# Altium PCB FPV0-3.PcbDoc (part 6 of 6)
Units mm, origin at the board's own origin, x right, y up, seen from the top; angles counter-clockwise.
Board outline 81.28 x 53.34 mm, 4 copper layers (Top Layer, GND Plane 1, 3v3 Plane 2, Bottom Layer); 178 components, 250 nets, 836 pads, 217 vias.
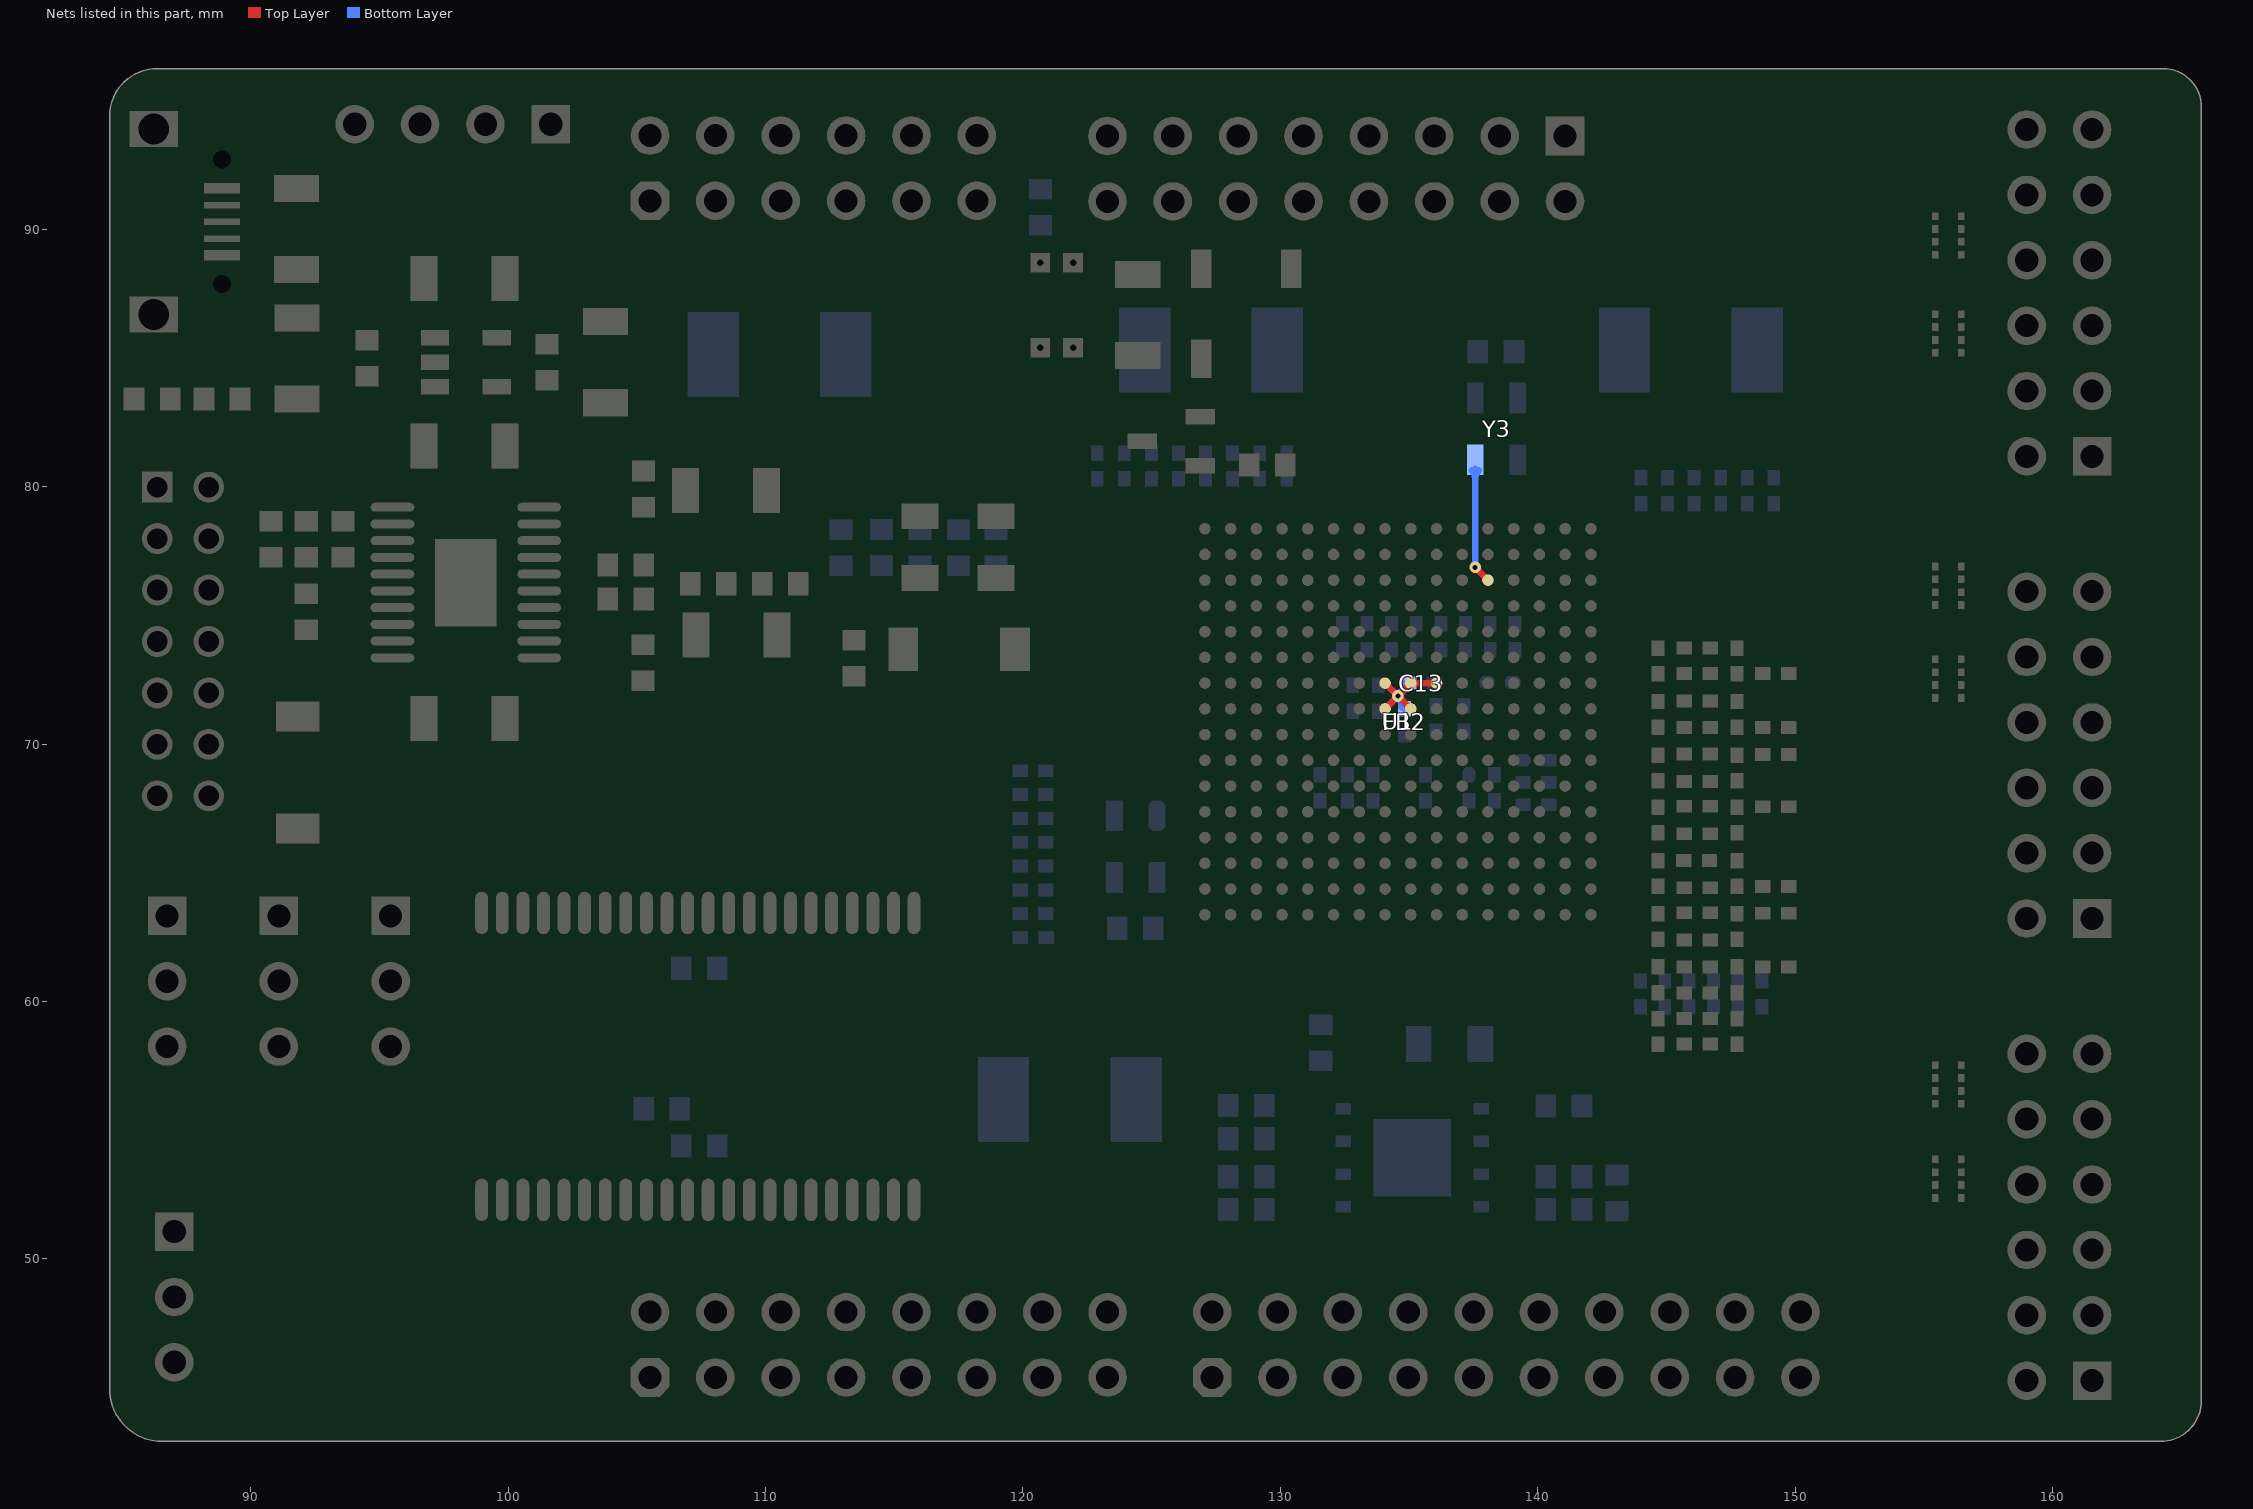
[diagram p8: the nets of this part, all layers, seen from the top]

## Via types
v1: diameter 0.45, hole 0.2, Top Layer to Bottom Layer, tented both sides, 150 vias
v2: diameter 0.55, hole 0.3, Top Layer to Bottom Layer, tented both sides, 55 vias
v3: diameter 0.45, hole 0.2, Top Layer to Bottom Layer, 6 vias
v4: diameter 0.666, hole 0.4, Top Layer to Bottom Layer, tented both sides, 4 vias
v5: diameter 0.513, hole 0.3, Top Layer to Bottom Layer, tented both sides, 1 vias
v6: diameter 0.55, hole 0.23, Top Layer to Bottom Layer, tented both sides, 1 vias

## Nets (pads, with @x,y where several pads share a name; then routed paths per layer and width w, separated by ;. In a path a pad name is that pad's centre, name@x,y a point inside that pad or via, vN(x,y) a via of type N, cw(c..) or ccw(c..) an arc to the next point about the centre after c; other vN are vias at no path point) (continued)
XADCGND: C13.2 FB2.2 U1.G7 U1.H7 U1.H8 U1.J7 U1.J8 | length 10.8
  Top Layer w0.254: U1.J8@134.069,71.366 v1(134.569,71.866) ; U1.J8@134.069,71.464 ccw(c134.069,71.701) 134.236,71.533 ccw(c134.404,71.366) U1.J8@134.167,71.366 ; U1.J7@134.069,72.268 cw(c134.069,72.031) 134.236,72.199 cw(c134.404,72.366) U1.J7@134.167,72.366 ; U1.J7@134.069,72.366 v1(134.569,71.866) ; U1.H8@134.971,71.366 ccw(c134.735,71.366) 134.902,71.533 ccw(c135.069,71.701) U1.H8@135.069,71.464 ; U1.H7@134.971,72.366 cw(c134.735,72.366) 134.902,72.199 cw(c135.069,72.031) U1.H7@135.069,72.268 ; U1.H8@135.069,71.366 v1(134.569,71.866) ; U1.H7@135.138,72.297 cw(c135.306,72.129) 135.306,72.366 cw(c135.306,72.603) U1.H7@135.138,72.435 ; U1.G7@136,72.297 ccw(c135.833,72.129) 135.833,72.366 ccw(c135.833,72.603) U1.G7@136,72.435 ; U1.G7@136.069,72.366 U1.H7@135.069,72.366 v1(134.569,71.866) ; 134.402,71.699 cw(c134.569,71.531) 134.569,71.768 cw(c134.569,71.531) 134.736,71.699 cw(c134.904,71.866) 134.667,71.866 cw(c134.904,71.866) 134.736,72.033 cw(c134.569,72.201) 134.569,71.964 cw(c134.569,72.201) 134.402,72.033 cw(c134.235,71.866) 134.471,71.866 cw(c134.235,71.866) 134.402,71.699
  Bottom Layer w0.254: v1@134.544,71.961 ccw(c134.463,72.261) 134.733,72.106 ; v1@134.569,71.768 cw(c134.569,71.531) 134.736,71.699 cw(c134.904,71.866) 134.667,71.866 cw(c134.904,71.866) 134.736,72.033 cw(c134.569,72.201) v1@134.569,71.964 ; v1@134.629,71.926 ccw(c134.19,72.365) C13.2@134.811,72.365 ; FB2.2@134.702,71.438 ccw(c134.229,71.526) v1(134.569,71.866) ; FB2.2@134.823,71.366 134.823,71.612 v1(134.569,71.866) ; C13.2@135.068,72.365 v1(134.569,71.866)
XCLK: U1.E3 Y3.3 | length 6.4
  Top Layer w0.254: v1@137.569,76.768 cw(c137.569,76.531) 137.736,76.699 cw(c137.904,76.866) v1@137.667,76.866 ; v1(137.569,76.866) U1.E3@138.069,76.366 ; 137.902,76.533 cw(c137.735,76.366) U1.E3@137.971,76.366 ; 137.902,76.533 ccw(c138.069,76.701) U1.E3@138.069,76.464
  Bottom Layer w0.254: Y3.3@137.439,80.631 cw(c137.125,80.317) 137.569,80.317 ; v1@137.5,76.935 ccw(c137.332,77.103) 137.569,77.103 ccw(c137.806,77.103) v1@137.638,76.935 ; v1(137.569,76.866) Y3.3@137.569,80.693 ; 137.569,80.268 cw(c138.082,80.268) Y3.3@137.719,80.631
pads on no net: JTAG1.12 LS1.0 P2.2 P2.4 P2.6 P2.8 P3.1 U3.1 U3.2 U3.21 U3.22 U3.23 U3.24 U3.25 U3.42 U3.43 U3.44 U4.1 U4.11 U4.20 USB1.0 USB1.2 USB1.3 USB1.4 USB1.6 USB1.7 Y1.1 Y3.1
copper on no net: | length 55.5
  Top Layer w0.127: 92.532,46.66 94.48,46.66 ; 92.532,46.787 94.099,46.787 ; 92.532,46.914 93.718,46.914 ; 92.659,45.263 94.734,45.263 ; 92.786,46.533 92.956,46.533 ; 92.913,45.39 93.464,45.39 ; 93.04,45.136 94.607,45.136 ; 93.167,45.517 93.464,45.517 ; 93.167,45.644 93.464,45.644 ; 93.167,45.771 93.464,45.771 ; 93.167,45.898 93.464,45.898 ; 93.167,46.025 93.464,46.025 ; 93.167,46.152 93.464,46.152 ; 93.167,46.533 94.607,46.533 ; 93.294,44.882 94.099,44.882 ; 93.294,45.009 94.353,45.009 ; 93.294,46.279 93.591,46.279 ; 93.294,46.406 93.591,46.406 ; 93.421,44.755 93.972,44.755 ; 93.929,45.39 94.861,45.39 ; 94.183,45.517 94.861,45.517 ; 94.31,45.644 94.988,45.644 ; 94.31,46.406 94.734,46.406 ; 94.437,45.771 94.988,45.771 ; 94.564,45.898 94.988,45.898 ; 94.564,46.025 94.988,46.025 ; 94.691,46.152 94.988,46.152 ; 94.691,46.279 94.861,46.279 ; 95.199,46.66 97.147,46.66 ; 95.199,46.787 96.766,46.787 ; 95.199,46.914 96.385,46.914 ; 95.326,45.263 97.401,45.263 ; 95.453,46.533 95.623,46.533 ; 95.58,45.39 96.131,45.39 ; 95.707,45.136 97.274,45.136 ; 95.834,45.517 96.131,45.517 ; 95.834,45.644 96.131,45.644 ; 95.834,45.771 96.131,45.771 ; 95.834,45.898 96.131,45.898 ; 95.834,46.025 96.131,46.025 ; 95.834,46.152 96.131,46.152 ; 95.834,46.533 97.274,46.533 ; 95.961,44.882 96.766,44.882 ; 95.961,45.009 97.02,45.009 ; 95.961,46.279 96.258,46.279 ; 95.961,46.406 96.258,46.406 ; 96.088,44.755 96.639,44.755 ; 96.596,45.39 97.528,45.39 ; 96.85,45.517 97.528,45.517 ; 96.977,45.644 97.655,45.644 ; 96.977,46.406 97.401,46.406 ; 97.104,45.771 97.655,45.771 ; 97.231,45.898 97.655,45.898 ; 97.231,46.025 97.655,46.025 ; 97.358,46.152 97.655,46.152 ; 97.358,46.279 97.528,46.279 ; 98.12,45.136 98.544,45.136 ; 98.12,45.263 98.544,45.263 ; 98.12,45.39 98.544,45.39 ; 98.247,44.882 98.544,44.882 ; 98.247,45.009 98.544,45.009 ; 98.247,45.517 98.544,45.517 ; 98.247,45.644 99.052,45.644 ; 98.247,45.771 99.179,45.771 ; 98.247,45.898 98.671,45.898 ; 98.247,46.025 98.671,46.025 ; 98.247,46.152 98.671,46.152 ; 98.247,46.279 98.671,46.279 ; 98.247,46.406 98.671,46.406 ; 98.247,46.533 98.798,46.533 ; 98.247,46.914 98.671,46.914 ; 98.374,44.755 98.544,44.755 ; 98.374,46.66 98.798,46.66 ; 98.374,46.787 98.671,46.787 ; 98.374,47.041 98.544,47.041 ; 98.755,45.517 99.306,45.517 ; 98.882,45.39 99.433,45.39 ; 99.009,45.263 99.56,45.263 ; 99.009,45.898 99.306,45.898 ; 99.136,45.136 99.814,45.136 ; 99.136,46.025 99.433,46.025 ; 99.136,46.152 99.56,46.152 ; 99.263,46.279 99.941,46.279 ; 99.39,45.009 99.941,45.009 ; 99.39,46.406 99.941,46.406 ; 99.39,46.533 100.068,46.533 ; 99.517,44.882 100.068,44.882 ; 99.517,46.66 100.068,46.66 ; 99.644,46.787 100.068,46.787 ; 99.771,44.755 100.068,44.755 ; 99.771,46.914 99.941,46.914

## Polygon pours and split planes (outlines as drawn)
GND on GND Plane 1 (split plane): 86.346,95.73 164.316,95.73 164.328,95.731 164.441,95.724 164.565,95.699 164.684,95.659 164.797,95.603 164.901,95.533 164.996,95.45 165.079,95.356 165.149,95.251 165.204,95.139 165.245,95.019 165.269,94.896 165.277,94.783 165.275,94.771 165.275,44.481 165.277,44.467 165.268,44.341 165.241,44.203 165.196,44.07 165.134,43.945 165.056,43.828 164.964,43.723 164.858,43.63 164.742,43.552 164.616,43.49 164.483,43.445 164.346,43.418 164.219,43.41 164.206,43.411 86.556,43.411 86.541,43.41 86.383,43.418 86.213,43.447 86.047,43.495 85.887,43.561 85.735,43.645 85.594,43.745 85.466,43.86 85.35,43.989 85.25,44.13 85.167,44.282 85.1,44.441 85.053,44.607 85.024,44.778 85.015,44.935 85.016,44.951 85.016,94.401 85.015,94.414 85.023,94.55 85.048,94.697 85.089,94.84 85.146,94.978 85.218,95.109 85.305,95.231 85.404,95.342 85.516,95.442 85.637,95.528 85.768,95.6 85.906,95.657 86.05,95.699 86.197,95.724 86.333,95.731
3V3 on 3v3 Plane 2 (split plane): 86.346,95.73 164.316,95.73 164.328,95.731 164.441,95.724 164.565,95.699 164.684,95.659 164.797,95.603 164.901,95.533 164.996,95.45 165.079,95.356 165.149,95.251 165.204,95.139 165.245,95.019 165.269,94.896 165.277,94.783 165.275,94.771 165.275,44.481 165.277,44.467 165.268,44.341 165.241,44.203 165.196,44.07 165.134,43.945 165.056,43.828 164.964,43.723 164.858,43.63 164.742,43.552 164.616,43.49 164.483,43.445 164.346,43.418 164.219,43.41 164.206,43.411 86.556,43.411 86.541,43.41 86.383,43.418 86.213,43.447 86.047,43.495 85.887,43.561 85.735,43.645 85.594,43.745 85.466,43.86 85.35,43.989 85.25,44.13 85.167,44.282 85.1,44.441 85.053,44.607 85.024,44.778 85.015,44.935 85.016,44.951 85.016,94.401 85.015,94.414 85.023,94.55 85.048,94.697 85.089,94.84 85.146,94.978 85.218,95.109 85.305,95.231 85.404,95.342 85.516,95.442 85.637,95.528 85.768,95.6 85.906,95.657 86.05,95.699 86.197,95.724 86.333,95.731

## Keep-outs
Keep-Out Layer:
  the board outline again, w0.254

## Other copper
Top Layer:
  text "追求卓越!" at 144.297,92.532 h2.54

## Silkscreen, mask and mechanical layers (free items; w line width, h text height)
Top Overlay:
  text "3V3" at 122.86,95.123 h0.76
  text "GND" at 125.387,95.123 h0.76
  text "GND" at 127.914,95.123 h0.76
  text "3V3" at 130.442,95.123 h0.76
  text "GND" at 132.969,95.123 h0.76
  text "GND" at 135.496,95.123 h0.76
  text "3V3" at 138.024,95.123 h0.76
  text "5V" at 93.65,91.948 h0.76
  text "GND" at 96.012,91.948 h0.76
  text "5V" at 86.995,91.389 h0.76
  text ">" at 91.516,90.068 h0.76 r270
  text "5V" at 96.469,89.535 h0.76
  text "GND" at 86.944,87.909 h0.76
  text "<" at 98.069,87.833 h0.76
  text "+" at 120.472,87.605 h0.76
  text "5V" at 93.066,87.224 h0.76
  text ">" at 124.765,86.462 h0.76 r90
  text "1V0" at 101.067,86.208 h0.76
  text "F" at 91.643,84.684 h0.76
  text "F" at 103.454,84.404 h1.27
  text "10uF" at 95.682,84.353 h0.76 r90
  text "10uF" at 100.787,84.277 h0.76 r90
  text "5K1" at 85.649,84.201 h0.76
  text "<" at 88.697,84.176 h0.76
  text "5V" at 94.844,82.601 h0.76
  text "5V" at 90.043,82.067 h0.76
  text "<" at 98.12,81.305 h0.76
  text ">" at 115.748,80.289 h0.76 r270
  text ">" at 118.643,80.289 h0.76 r270
  text "1K5" at 128.956,79.705 h0.76
  text "3V3" at 90.119,79.477 h0.76 r90
  text "F" at 108.102,79.4 h1.27
  text "10K" at 90.221,79.324 h0.76
  text "10uF" at 91.542,79.324 h0.76
  text "20K" at 93.091,79.324 h0.76
  text "10uF" at 104.521,79.299 h0.76 r90
  text "250K" at 103.81,77.622 h0.76
  text "TMS" at 90.119,77.489 h0.76 r90
  text "2K" at 110.236,76.911 h0.76
  text ">" at 107.645,75.921 h0.76
  text "TCK" at 90.119,75.501 h0.76 r90
  text "2K" at 93.32,74.727 h0.76 r90
  text "250K" at 103.81,74.473 h0.76
  text "1K" at 147.422,74.295 h0.76
  text "F" at 108.509,73.812 h1.27
  text "TDO" at 90.119,73.514 h0.76 r90
  text "1K" at 112.7,73.076 h0.76 r90
  text "5V" at 93.65,72.771 h0.76
  text "1nF" at 144.069,72.746 h0.76 r90
  text "2K23" at 150.393,72.517 h0.76
  text "10uF" at 104.47,72.466 h0.76 r90
  text "TDI" at 90.113,71.526 h0.76 r90
  text "1nF" at 144.069,70.703 h0.76 r90
  text "<" at 98.095,70.688 h0.76
  text "2K23" at 150.444,70.383 h0.76
  text "2K23" at 150.444,69.317 h0.76
  text "5V" at 96.342,69.088 h0.76
  text "1nF" at 144.069,68.66 h0.76 r90
  text "PRO" at 90.119,67.386 h0.76 r90
  text "2K23" at 150.444,67.335 h0.76
  text "1nF" at 144.069,66.617 h0.76 r90
  text "1nF" at 144.069,64.574 h0.76 r90
  text "2K23" at 150.444,64.186 h0.76
  text "2K23" at 150.444,63.221 h0.76
  text "3V3" at 88.443,63.119 h0.76
  text "3V3" at 92.837,63.119 h0.76
  text "1nF" at 144.069,62.531 h0.76 r90
  text "2K23" at 150.444,61.112 h0.76
  text "1nF" at 144.069,60.488 h0.76 r90
  text "1nF" at 144.069,58.445 h0.76 r90
  text "GND" at 88.417,57.861 h0.76
  text "GND" at 92.786,57.861 h0.76
  text "M0" at 86.106,55.474 h1.27
  text "M1" at 90.653,55.479 h1.27
  text "M2" at 94.996,55.474 h1.27
  text "May the Force be with You ! ! !" at 123.241,55.169 h2.54
  text "DIN" at 88.742,51.613 h0.76 r270
  text "SCK" at 88.748,49.057 h0.76 r270
  text "GND" at 88.748,46.457 h0.76 r270
Bottom Overlay:
  text "1K" at 121.437,90.576 h0.76 r270
  text "PT" at 98.933,87.655 h1.27
  text "104" at 139.217,85.979 h0.76
  text "PT" at 98.958,81.178 h1.27
  text "GND" at 140.03,80.416 h0.76 r270
  text "100R" at 116.256,76.241 h0.76 r90
  text "100R" at 119.228,76.241 h0.76 r90
  text "4K7" at 113.157,76.098 h0.76 r90
  text "4K7" at 114.656,76.098 h0.76 r90
  text "200R" at 117.78,76.099 h0.76 r90
  text "4K7" at 139.598,71.095 h1.27
  text "PT" at 98.958,70.561 h1.27
  text "GND" at 122.276,66.65 h0.76 r270
  text "104" at 124.943,61.036 h0.76
  text "104" at 106.858,60.503 h0.76 r180
  text "49R9" at 137.363,59.258 h0.76
  text "1K" at 130.835,58.903 h1.27 r90
  text "1K" at 106.248,56.566 h0.76
  text "1K8" at 127.076,56.515 h0.76 r90
  text "100R" at 127.079,55.406 h0.64 r90
  text "104" at 106.02,54.915 h0.76 r90
  text "100R" at 141.732,54.762 h0.76
  text "100R" at 127.079,53.902 h0.64 r90
  text "100R" at 141.732,53.873 h0.76
  text "104" at 144.323,53.111 h0.76 r90
  text "4K7" at 127.076,52.07 h0.76 r90
  text "1K8" at 141.503,50.622 h0.76

## Text inside footprints (layer, text, board x,y; h text height)
LS1: Top Overlay "+" at 127.787,88.621 h0.76 r270